# EAGLE board can_main_mb_v18_r4 (EAGLE 8.0.1), part 1 of 2
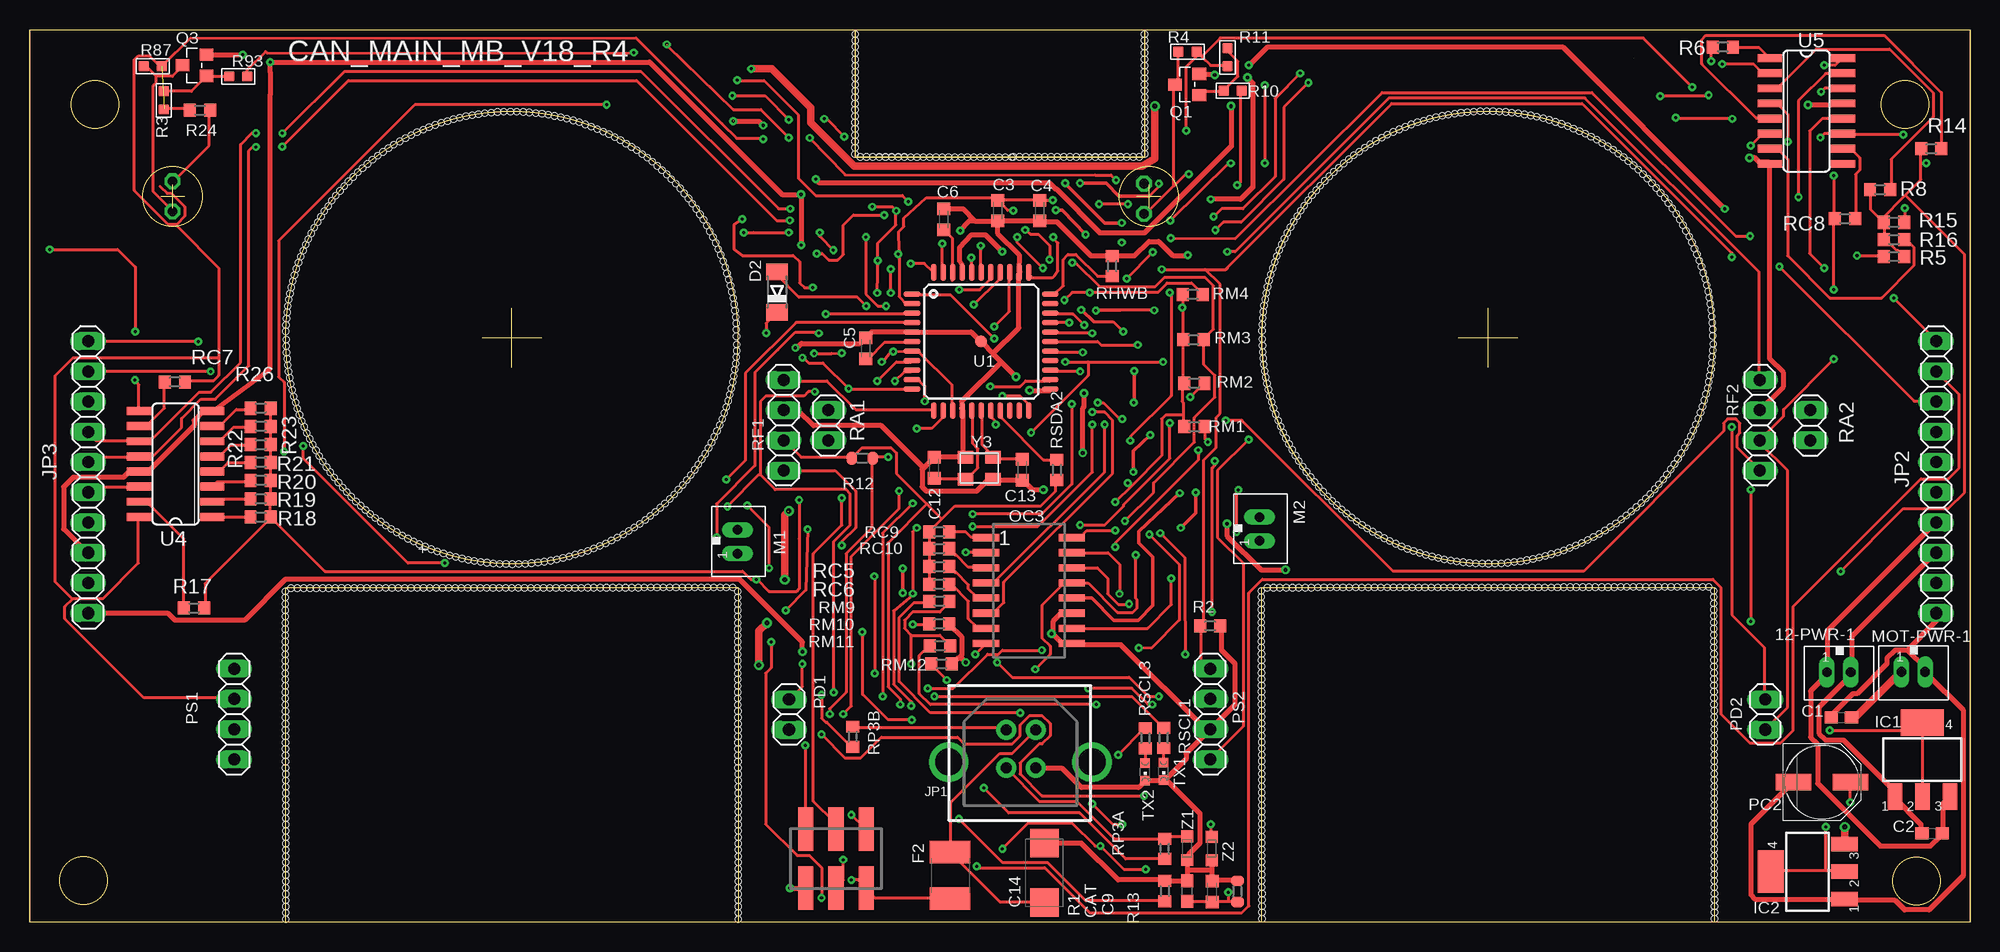
[diagram p0: board, top side]
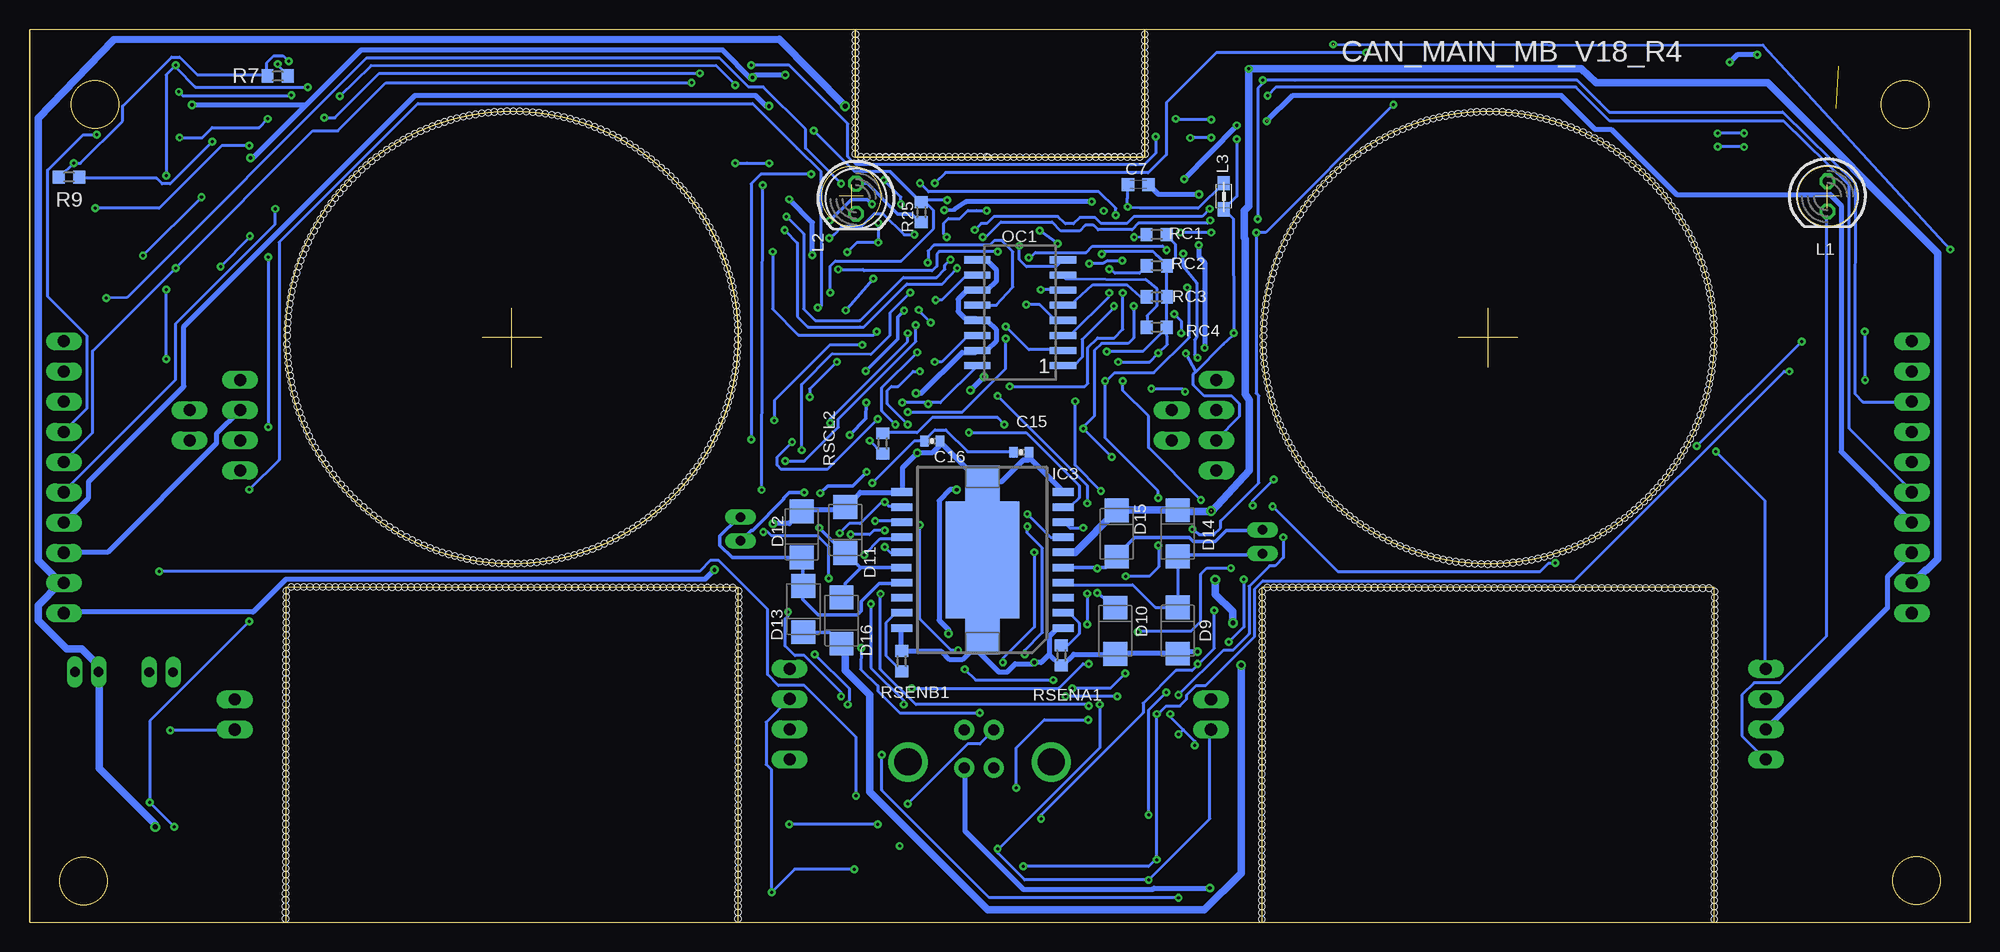
[diagram p1: board, bottom side, seen from below]

Size 163 x 75 mm. Coordinates in mm from the lower left corner, seen from the top.
Outline: 40.5,46.62 40.5,51.62
Outline: 38,49.12 43,49.12
Outline: 120,49.12 125,49.12
Outline: 122.5,46.62 122.5,51.62
Outline: 2.5,75 69.33,75
Outline: 69.33,75 93.64,75
Outline: 93.64,75 162.5,75
Outline: 162.5,0 59.5,0
Outline: 59.5,0 21.5,0
Outline: 21.5,0 2.5,0
Outline: 21.5,0 21.5,28.13 59.5,28.13 59.5,0
Outline: 103.5,0 103.5,28.13 141.5,28.13 141.5,0
Outline: 69.33,75 69.33,64.31 93.64,64.31 93.64,75
Outline: 93.67,75 163,75
Outline: 163,0 163,75
Outline: 163,0 141.5,0
Outline: 141.5,28.13 141.5,0
Outline: 103.5,28.13 141.5,28.13
Outline: 103.5,0 103.5,28.13
Outline: 103.5,0 59.5,0
Outline: 59.5,28.13 59.5,0
Outline: 21.5,28.13 59.5,28.13
Outline: 21.5,0 21.5,28.13
Outline: 21.5,0 0,0
Outline: 0,75 0,0
Outline: 0,75 69.36,75
Outline: 69.36,64.31 69.36,75
Outline: 93.67,64.31 69.36,64.31
Outline: 93.67,75 93.67,64.31
Outline: 93.67,75 163,75
Outline: 163,0 163,75
Outline: 163,0 141.5,0
Outline: 141.5,28.13 141.5,0
Outline: 103.5,28.13 141.5,28.13
Outline: 103.5,0 103.5,28.13
Outline: 103.5,0 59.5,0
Outline: 59.5,28.13 59.5,0
Outline: 21.5,28.13 59.5,28.13
Outline: 21.5,0 21.5,28.13
Outline: 21.5,0 0,0
Outline: 0,75 0,0
Outline: 0,75 69.36,75
Outline: 69.36,64.31 69.36,75
Outline: 93.67,64.31 69.36,64.31
Outline: 93.67,75 93.67,64.31
Outline: 21.5,0 0,0
Outline: 0,75 0,0
Outline: 0,75 69.36,75
Outline: 69.36,64.31 69.36,75
Outline: 93.67,64.31 69.36,64.31
Outline: 93.67,75 93.67,64.31
Outline: 93.67,75 163,75
Outline: 163,75 163,0
Outline: 163,0 141.5,0
Outline: 141.5,28.13 141.5,0
Outline: 103.5,28.13 141.5,28.13
Outline: 103.5,0 103.5,28.13
Outline: 103.5,0 59.5,0
Outline: 59.5,28.13 59.5,0
Outline: 21.5,28.13 59.5,28.13
Outline: 21.5,0 21.5,28.13
Outline: 93.67,75 163,75 163,0 141.5,0 141.5,28.13 103.5,28.13 103.5,0 59.5,0 59.5,28.13 21.5,28.13 21.5,0 0,0 0,75 69.36,75 69.36,64.31 93.67,64.31 93.67,75
Outline: 93.67,75 163,75 163,0 141.5,0 141.5,28.13 103.5,28.13 103.5,0 59.5,0 59.5,28.13 21.5,28.13 21.5,0 0,0 0,75 69.36,75 69.36,64.31 93.67,64.31 93.67,75
Outline: circle at 122.5,49.12 radius 19
Outline: circle at 40.5,49.12 radius 19
Outline: circle at 122.5,49.13 radius 19
Outline: circle at 40.5,49.13 radius 19
Outline: circle at 122.5,49.13 radius 19
Outline: circle at 40.5,49.13 radius 19
Outline: circle at 40.5,49.13 radius 19
Outline: circle at 122.5,49.13 radius 19
Outline: circle at 122.5,49.13 radius 19
Outline: circle at 40.5,49.13 radius 19
Outline: circle at 4.5,3.5 radius 2
Outline: circle at 158.5,3.47 radius 2
Outline: circle at 157.53,68.72 radius 2
Outline: circle at 122.5,49.13 radius 19
Outline: circle at 40.5,49.13 radius 19
Outline: circle at 5.47,68.72 radius 2
Outline: circle at 122.5,49.13 radius 19
Outline: circle at 40.5,49.13 radius 19
Outline: circle at 4.5,3.5 radius 2
Outline: circle at 158.5,3.47 radius 2
Copper layers (1*2*3*16): Top 0.035mm / dielectric 0.2mm / Route2 0.035mm / dielectric 0.15mm / Route3 0.035mm / dielectric 0.2mm / Bottom 0.035mm
Design rules "meditab *": minimum track width 7mil, minimum drill 7mil, track to track 7mil, track to pad 7mil, pad to pad 7mil, via to via 7mil, smd to smd 7mil, copper to edge 7mil, drill to drill 7mil, minimum pad ring 10mil, minimum via ring 8mil, stop-mask expansion 4mil, vias tented up to drill 0mil, thermal gap 10mil
Net classes: 0 default: width 0.254 mm, drill 0.254 mm, clearance 0.203 mm; 1 power: width 0.635 mm, drill 0.584 mm, clearance 0.305 mm; 2 gnd: width 0.406 mm, drill 0.305 mm, clearance 0.254 mm; 3 power usb: width 0.508 mm, drill 0.406 mm, clearance 0.203 mm; 4 motor: width 0.305 mm, drill 0.254 mm, clearance 0.203 mm; 5 0.6096: width 0.61 mm, drill 0.406 mm, clearance 0.305 mm
Holes 0.5 mm at 21.51,0.25 21.51,0.78 21.51,1.31 21.51,1.84 21.51,2.37 21.5,2.9 21.5,3.43 21.5,3.96 21.5,4.49 21.5,5.02 21.5,5.55 21.5,6.08 21.5,6.61 21.5,7.14 21.5,7.67 21.49,8.2 21.49,8.73 21.49,9.26 21.49,9.79 21.49,10.32 21.49,10.85 21.49,11.38 21.49,11.91 21.49,12.44 21.48,12.97 21.48,13.5 21.48,14.03 21.48,14.56 21.48,15.09 21.48,15.62 21.48,16.15 21.48,16.68 21.48,17.21 21.48,17.74 21.47,18.27 21.47,18.8 21.47,19.33 21.47,19.86 21.47,20.39 21.47,20.92 21.47,21.45 21.47,21.98 21.47,22.51 21.46,23.04 21.46,23.57 21.46,24.1 21.46,24.63 21.46,25.16 21.46,25.69 21.46,26.22 21.46,26.75 21.46,27.28 21.46,27.81 59.52,0.25 59.52,0.78 59.52,1.31 59.52,1.84 59.52,2.37 59.51,2.9 59.51,3.43 59.51,3.96 59.51,4.49 59.51,5.02 59.51,5.55 59.51,6.08 59.51,6.61 59.51,7.14 59.51,7.67 59.5,8.2 59.5,8.73 59.5,9.26 59.5,9.79 59.5,10.32 59.5,10.85 59.5,11.38 59.5,11.91 59.5,12.44 59.49,12.97 59.49,13.5 59.49,14.03 59.49,14.56 59.49,15.09 59.49,15.62 59.49,16.15 59.49,16.68 59.49,17.21 59.49,17.74 59.48,18.27 59.48,18.8 59.48,19.33 59.48,19.86 59.48,20.39 59.48,20.92 59.48,21.45 59.48,21.98 59.48,22.51 59.47,23.04 59.47,23.57 59.47,24.1 59.47,24.63 59.47,25.16 59.47,25.69 59.47,26.22 59.47,26.75 59.47,27.28 59.47,27.81 59.05,28.13 58.52,28.13 57.99,28.13 57.46,28.13 56.93,28.13 56.4,28.12 55.87,28.12 55.34,28.12 54.81,28.12 54.28,28.12 53.75,28.12 53.22,28.12 52.69,28.12 52.16,28.12 51.63,28.12 51.1,28.11 50.57,28.11 50.04,28.11 49.51,28.11 48.98,28.11 48.45,28.11 47.92,28.11 47.39,28.11 46.86,28.11 46.33,28.1 45.8,28.1 45.27,28.1 44.74,28.1 44.21,28.1 43.68,28.1 43.15,28.1 42.62,28.1 42.09,28.1 41.56,28.1 41.03,28.09 40.5,28.09 39.97,28.09 39.44,28.09 38.91,28.09 38.38,28.09 37.85,28.09 37.32,28.09 36.79,28.09 36.26,28.08 35.73,28.08 35.2,28.08 34.67,28.08 34.14,28.08 33.61,28.08 33.08,28.08 32.55,28.08 32.02,28.08 31.49,28.08 23.01,28.07 23.54,28.07 24.07,28.07 24.6,28.07 25.13,28.07 25.66,28.07 26.19,28.08 26.72,28.08 27.25,28.08 27.78,28.08 28.31,28.08 28.84,28.08 29.37,28.08 29.9,28.08 30.43,28.08 30.96,28.08 21.95,28.07 22.48,28.07 21.51,49.66 21.53,50.19 21.57,50.72 21.62,51.25 21.68,51.78 21.77,52.31 21.86,52.83 21.97,53.35 22.1,53.87 22.24,54.39 22.4,54.91 22.57,55.42 22.75,55.93 22.96,56.43 23.18,56.93 23.4,57.41 23.64,57.89 23.9,58.37 24.18,58.84 24.46,59.3 24.75,59.75 25.06,60.19 25.38,60.63 25.71,61.05 26.06,61.46 26.41,61.86 26.78,62.26 27.16,62.64 27.55,63.02 27.95,63.38 28.37,63.73 28.79,64.08 29.22,64.41 29.67,64.73 30.13,65.05 30.59,65.34 31.07,65.62 31.56,65.88 32.04,66.14 32.53,66.38 33.04,66.59 33.54,66.8 34.05,67 34.57,67.18 35.09,67.32 35.6,67.48 36.12,67.61 36.64,67.73 37.16,67.83 37.69,67.92 38.22,67.99 38.76,68.04 39.29,68.09 39.83,68.11 40.38,68.12 40.53,30.09 40,30.1 39.47,30.12 38.94,30.16 38.41,30.21 37.88,30.27 37.35,30.36 36.83,30.45 36.31,30.56 35.79,30.69 35.27,30.83 34.75,30.99 34.24,31.16 33.73,31.34 33.23,31.55 32.73,31.77 32.25,31.99 31.77,32.23 31.29,32.49 30.82,32.77 30.36,33.05 29.91,33.34 29.47,33.65 29.03,33.97 28.61,34.3 28.2,34.65 27.8,35 27.4,35.37 27.02,35.75 26.64,36.14 26.28,36.54 25.93,36.96 25.58,37.38 25.25,37.81 24.93,38.26 24.61,38.72 24.32,39.18 24.04,39.66 23.78,40.15 23.52,40.63 23.28,41.12 23.07,41.63 22.86,42.13 22.66,42.64 22.48,43.16 22.34,43.68 22.18,44.19 22.05,44.71 21.93,45.23 21.83,45.75 21.74,46.28 21.67,46.81 21.62,47.35 21.57,47.88 21.55,48.42 21.54,48.97 59.4,48.55 59.38,48.02 59.34,47.49 59.29,46.96 59.23,46.43 59.14,45.9 59.05,45.38 58.94,44.86 58.81,44.34 58.67,43.82 58.51,43.3 58.34,42.79 58.16,42.28 57.95,41.78 57.73,41.28 57.51,40.8 57.27,40.32 57.01,39.84 56.73,39.37 56.45,38.91 56.16,38.46 55.85,38.02 55.53,37.58 55.2,37.16 54.85,36.75 54.5,36.35 54.13,35.95 53.75,35.57 53.36,35.19 52.96,34.83 52.54,34.48 52.12,34.13 51.69,33.8 51.24,33.48 50.78,33.16 50.32,32.87 49.84,32.59 49.35,32.33 48.87,32.07 48.38,31.83 47.87,31.62 47.37,31.41 46.86,31.21 46.34,31.03 45.82,30.89 45.31,30.73 44.79,30.6 44.27,30.48 43.75,30.38 43.22,30.29 42.69,30.22 42.15,30.17 41.62,30.12 41.08,30.1 40.53,30.09 40.38,68.12 40.91,68.11 41.44,68.09 41.97,68.05 42.5,68 43.03,67.94 43.56,67.85 44.08,67.76 44.6,67.65 45.12,67.52 45.64,67.38 46.16,67.22 46.67,67.05 47.18,66.87 47.68,66.66 48.18,66.44 48.66,66.22 49.14,65.98 49.62,65.72 50.09,65.44 50.55,65.16 51,64.87 51.44,64.56 51.88,64.24 52.3,63.91 52.71,63.56 53.11,63.21 53.51,62.84 53.89,62.46 54.27,62.07 54.63,61.67 54.98,61.25 55.33,60.83 55.66,60.4 55.98,59.95 56.3,59.49 56.59,59.03 56.87,58.55 57.13,58.06 57.39,57.58 57.63,57.09 57.84,56.58 58.05,56.08 58.25,55.57 58.43,55.05 58.57,54.53 58.73,54.02 58.86,53.5 58.98,52.98 59.08,52.46 59.17,51.93 59.24,51.4 59.29,50.86 59.34,50.33 59.36,49.79 59.37,49.24 103.51,0.29 103.51,0.82 103.51,1.35 103.51,1.88 103.51,2.41 103.5,2.94 103.5,3.47 103.5,4 103.5,4.53 103.5,5.06 103.5,5.59 103.5,6.12 103.5,6.65 103.5,7.18 103.5,7.71 103.49,8.24 103.49,8.77 103.49,9.3 103.49,9.83 103.49,10.36 103.49,10.89 103.49,11.42 103.49,11.95 103.49,12.48 103.48,13.01 103.48,13.54 103.48,14.07 103.48,14.6 103.48,15.13 103.48,15.66 103.48,16.19 103.48,16.72 103.48,17.25 103.48,17.78 103.47,18.31 103.47,18.84 103.47,19.37 103.47,19.9 103.47,20.43 103.47,20.96 103.47,21.49 103.47,22.02 103.47,22.55 103.46,23.08 103.46,23.61 103.46,24.14 103.46,24.67 103.46,25.2 103.46,25.73 103.46,26.26 103.46,26.79 103.46,27.32 103.46,27.85 141.52,0.29 141.52,0.82 141.52,1.35 141.52,1.88 141.52,2.41 141.51,2.94 141.51,3.47 141.51,4 141.51,4.53 141.51,5.06 141.51,5.59 141.51,6.12 141.51,6.65 141.51,7.18 141.51,7.71 141.5,8.24 141.5,8.77 141.5,9.3 141.5,9.83 141.5,10.36 141.5,10.89 141.5,11.42 141.5,11.95 141.5,12.48 141.49,13.01 141.49,13.54 141.49,14.07 141.49,14.6 141.49,15.13 141.49,15.66 141.49,16.19 141.49,16.72 141.49,17.25 141.49,17.78 141.48,18.31 141.48,18.84 141.48,19.37 141.48,19.9 141.48,20.43 141.48,20.96 141.48,21.49 141.48,22.02 141.48,22.55 141.47,23.08 141.47,23.61 141.47,24.14 141.47,24.67 141.47,25.2 141.47,25.73 141.47,26.26 141.47,26.79 141.47,27.32 141.47,27.85 141.05,28.17 140.52,28.17 139.99,28.17 139.46,28.17 138.93,28.17 138.4,28.16 137.87,28.16 137.34,28.16 136.81,28.16 136.28,28.16 135.75,28.16 135.22,28.16 134.69,28.16 134.16,28.16 133.63,28.16 133.1,28.15 132.57,28.15 132.04,28.15 131.51,28.15 130.98,28.15 130.45,28.15 129.92,28.15 129.39,28.15 128.86,28.15 128.33,28.14 127.8,28.14 127.27,28.14 126.74,28.14 126.21,28.14 125.68,28.14 125.15,28.14 124.62,28.14 124.09,28.14 123.56,28.14 123.03,28.13 122.5,28.13 121.97,28.13 121.44,28.13 120.91,28.13 120.38,28.13 119.85,28.13 119.32,28.13 118.79,28.13 118.26,28.12 117.73,28.12 117.2,28.12 116.67,28.12 116.14,28.12 115.61,28.12 115.08,28.12 114.55,28.12 114.02,28.12 113.49,28.12 105.01,28.11 105.54,28.11 106.07,28.11 106.6,28.11 107.13,28.11 107.66,28.11 108.19,28.12 108.72,28.12 109.25,28.12 109.78,28.12 110.31,28.12 110.84,28.12 111.37,28.12 111.9,28.12 112.43,28.12 112.96,28.12 103.95,28.11 104.48,28.11 103.51,49.7 103.53,50.23 103.57,50.76 103.62,51.29 103.68,51.82 103.77,52.35 103.86,52.87 103.97,53.39 104.1,53.91 104.24,54.43 104.4,54.95 104.57,55.46 104.75,55.97 104.96,56.47 105.18,56.97 105.4,57.45 105.64,57.93 105.9,58.41 106.18,58.88 106.46,59.34 106.75,59.79 107.06,60.23 107.38,60.67 107.71,61.09 108.06,61.5 108.41,61.9 108.78,62.3 109.16,62.68 109.55,63.06 109.95,63.42 110.37,63.77 110.79,64.12 111.22,64.45 111.67,64.77 112.13,65.09 112.59,65.38 113.07,65.66 113.56,65.92 114.04,66.18 114.53,66.42 115.04,66.63 115.54,66.84 116.05,67.04 116.57,67.22 117.09,67.36 117.6,67.52 118.12,67.65 118.64,67.77 119.16,67.87 119.69,67.96 120.22,68.03 120.76,68.08 121.29,68.13 121.83,68.15 122.38,68.16 122.53,30.13 122,30.14 121.47,30.16 120.94,30.2 120.41,30.25 119.88,30.31 119.35,30.4 118.83,30.49 118.31,30.6 117.79,30.73 117.27,30.87 116.75,31.03 116.24,31.2 115.73,31.38 115.23,31.59 114.73,31.81 114.25,32.03 113.77,32.27 113.29,32.53 112.82,32.81 112.36,33.09 111.91,33.38 111.47,33.69 111.03,34.01 110.61,34.34 110.2,34.69 109.8,35.04 109.4,35.41 109.02,35.79 108.64,36.18 108.28,36.58 107.93,37 107.58,37.42 107.25,37.85 106.93,38.3 106.61,38.76 106.32,39.22 106.04,39.7 105.78,40.19 105.52,40.67 105.28,41.16 105.07,41.67 104.86,42.17 104.66,42.68 104.48,43.2 104.34,43.72 104.18,44.23 104.05,44.75 103.93,45.27 103.83,45.79 103.74,46.32 103.67,46.85 103.62,47.39 103.57,47.92 103.55,48.46 103.54,49.01 141.4,48.59 141.38,48.06 141.34,47.53 141.29,47 141.23,46.47 141.14,45.94 141.05,45.42 140.94,44.9 140.81,44.38 140.67,43.86 140.51,43.34 140.34,42.83 140.16,42.32 139.95,41.82 139.73,41.32 139.51,40.84 139.27,40.36 139.01,39.88 138.73,39.41 138.45,38.95 138.16,38.5 137.85,38.06 137.53,37.62 137.2,37.2 136.85,36.79 136.5,36.39 136.13,35.99 135.75,35.61 135.36,35.23 134.96,34.87 134.54,34.52 134.12,34.17 133.69,33.84 133.24,33.52 132.78,33.2 132.32,32.91 131.84,32.63 131.35,32.37 130.87,32.11 130.38,31.87 129.87,31.66 129.37,31.45 128.86,31.25 128.34,31.07 127.82,30.93 127.31,30.77 126.79,30.64 126.27,30.52 125.75,30.42 125.22,30.33 124.69,30.26 124.15,30.21 123.62,30.16 123.08,30.14 122.53,30.13 122.38,68.16 122.91,68.15 123.44,68.13 123.97,68.09 124.5,68.04 125.03,67.98 125.56,67.89 126.08,67.8 126.6,67.69 127.12,67.56 127.64,67.42 128.16,67.26 128.67,67.09 129.18,66.91 129.68,66.7 130.18,66.48 130.66,66.26 131.14,66.02 131.62,65.76 132.09,65.48 132.55,65.2 133,64.91 133.44,64.6 133.88,64.28 134.3,63.95 134.71,63.6 135.11,63.25 135.51,62.88 135.89,62.5 136.27,62.11 136.63,61.71 136.98,61.29 137.33,60.87 137.66,60.44 137.98,59.99 138.3,59.53 138.59,59.07 138.87,58.59 139.13,58.1 139.39,57.62 139.63,57.13 139.84,56.62 140.05,56.12 140.25,55.61 140.43,55.09 140.57,54.57 140.73,54.06 140.86,53.54 140.98,53.02 141.08,52.5 141.17,51.97 141.24,51.44 141.29,50.9 141.34,50.37 141.36,49.83 141.37,49.28 71.35,64.29 71.88,64.29 72.41,64.29 72.94,64.29 73.47,64.29 74,64.29 74.53,64.3 75.06,64.3 75.59,64.3 76.12,64.3 76.65,64.3 77.18,64.3 77.71,64.3 78.24,64.3 78.77,64.3 79.3,64.3 82.48,64.3 81.95,64.3 81.42,64.3 80.89,64.3 80.36,64.3 79.83,64.3 69.33,73.04 69.33,72.51 69.33,71.98 69.33,71.45 69.33,70.92 69.33,70.39 69.33,69.86 69.32,69.33 69.32,68.8 69.32,68.27 69.32,67.74 69.32,67.21 69.32,66.68 69.32,66.15 69.32,65.62 69.32,65.09 69.32,64.56 70.82,64.31 71.35,64.31 71.88,64.31 72.41,64.31 72.94,64.31 73.47,64.31 74,64.3 74.53,64.3 75.06,64.3 75.59,64.3 76.12,64.3 76.65,64.3 77.18,64.3 69.76,64.31 70.29,64.31 69.33,74.63 69.33,74.1 69.33,73.57 69.33,73.04 91.62,64.3 91.09,64.3 90.56,64.3 90.03,64.3 89.5,64.3 88.97,64.3 88.44,64.31 87.91,64.31 87.38,64.31 86.85,64.31 86.32,64.31 85.79,64.31 85.26,64.31 84.73,64.31 84.2,64.31 83.67,64.31 82.61,64.31 83.14,64.31 93.64,73.05 93.64,72.52 93.64,71.99 93.64,71.46 93.64,70.93 93.64,70.4 93.64,69.87 93.65,69.34 93.65,68.81 93.65,68.28 93.65,67.75 93.65,67.22 93.65,66.69 93.65,66.16 93.65,65.63 93.65,65.1 93.65,64.57 92.15,64.32 91.62,64.32 91.09,64.32 90.56,64.32 90.03,64.32 89.5,64.32 88.97,64.31 88.44,64.31 87.91,64.31 87.38,64.31 86.85,64.31 86.32,64.31 85.79,64.31 93.21,64.32 92.68,64.32 93.64,74.64 93.64,74.11 93.64,73.58 93.64,73.05
Milling: area 9.5,58.5 to 14.5,63.5; area 91.5,58.5 to 96.5,63.5; 13 lines

## Footprints (pad centres in the part's own frame; a part is rotated, then mirrored left to right if it is on the bottom)
JST_B2B-PH_HEADER = drill 0.8 long: P1 1.075,0.048; P2 -0.925,0.048
C0603 = smd 1.1 x 1: 1 -0.85,0; 2 0.85,0
C0603K = smd 1.05 x 1.08: 1 -0.875,0; 2 0.875,0
SMC_C = smd 2.4 x 2.4: + -2.5,0; - 2.5,0
0402-CAP = smd 0.7 x 0.9: 1 -0.65,0; 2 0.65,0
0603 = smd 1.1 x 1: 1 -0.85,0; 2 0.85,0
MINIMELF = smd 1.4 x 1.8: A 1.7,0; C -1.7,0
SMA = smd 2 x 2: P$1 -1.94,0; P$2 1.94,0
L1812 = smd 1.9 x 3.4: 1 -1.95,0; 2 1.95,0
SOT223 = smd 1.219 x 2.235: 1 -2.311,-3.099; 2 0,-3.099; 3 2.311,-3.099 | smd 3.6 x 2.2: 4 0,3.099
POWER-SO20 = smd 0.635 x 1.778: P$1 -5.715,-6.782; P$2 -4.445,-6.782; P$3 -3.175,-6.782; P$4 -1.905,-6.782; P$5 -0.635,-6.782; P$6 0.635,-6.782; P$7 1.905,-6.782; P$8 3.175,-6.782; P$9 4.445,-6.782; P$10 5.715,-6.782; P$11 5.715,6.782; P$12 4.445,6.782; P$13 3.175,6.782; P$14 1.905,6.782; P$15 0.635,6.782; P$17 -1.905,6.782; P$18 -3.175,6.782; P$19 -4.445,6.782; P$20 -5.715,6.782 | smd 0.635 x 1.651: P$16 -0.635,6.833 | smd 9.804 x 6.198: P$21 0,0 | smd 3.048 x 2.921: P$22 -6.426,0; P$23 6.426,0
TSM-103-XX-XXX-DV-A = smd 1.27 x 3.683: 1 -2.54,-2.477; 2 -2.54,2.477; 3 0,-2.477; 4 0,2.477; 5 2.54,-2.477; 6 2.54,2.477
USB-B-PTH-VERTICAL = drill 0.914 pad 1.676: D+ 4.826,4.394; D- 4.826,7.595; GND 7.315,4.394; VBUS 7.315,7.595 | drill 2.286: P$1 0,4.902; P$2 12.04,4.902
1X10 = drill 1.016 long: 1 -11.43,0; 2 -8.89,0; 3 -6.35,0; 4 -3.81,0; 5 -1.27,0; 6 1.27,0; 7 3.81,0; 8 6.35,0; 9 8.89,0; 10 11.43,0
LED5MM = drill 0.813 octagon: A -1.27,0; K 1.27,0
0805 = smd 1.2 x 1: 1 -1.1,0; 2 1.1,0
SOP16 = smd 0.6 x 2.2: 1 -4.455,-3.6; 2 -3.185,-3.6; 3 -1.915,-3.6; 4 -0.645,-3.6; 5 0.625,-3.6; 6 1.895,-3.6; 7 3.165,-3.6; 8 4.435,-3.6; 9 4.435,3.6; 10 3.165,3.6; 11 1.895,3.6; 12 0.625,3.6; 13 -0.645,3.6; 14 -1.915,3.6; 15 -3.185,3.6; 16 -4.455,3.6
PANASONIC_D = smd 3 x 1.4: + 2.4,0; - -2.4,0
1X02 = drill 1.016 long: 1 -1.27,0; 2 1.27,0
1X04 = drill 1.016 long: 1 -3.81,0; 2 -1.27,0; 3 1.27,0; 4 3.81,0
SOT23 = smd 1.016 x 1.143: 1 -0.889,-1.016; 2 0.889,-1.016; 3 0,1.016
R0603 = smd 1 x 1.1: 1 -0.85,0; 2 0.85,0
R0603' = smd 0.889 x 0.889: 1 -0.762,0; 2 0.762,0
R0603-ROUND = smd 0.898 x 1.1: 1 -0.889,0; 2 0.889,0
CHIPLED_0603 = smd 0.8 x 0.8: A 0,-0.75; C 0,0.75
TQFP44-PAD = smd 1.4 x 0.45: 1 -5.8,4; 2 -5.8,3.2; 3 -5.8,2.4; 4 -5.8,1.6; 5 -5.8,0.8; 6 -5.8,0; 7 -5.8,-0.8; 8 -5.8,-1.6; 9 -5.8,-2.4; 10 -5.8,-3.2; 11 -5.8,-4; 23 5.8,-4; 24 5.8,-3.2; 25 5.8,-2.4; 26 5.8,-1.6; 27 5.8,-0.8; 28 5.8,0; 29 5.8,0.8; 30 5.8,1.6; 31 5.8,2.4; 32 5.8,3.2; 33 5.8,4 | smd 0.45 x 1.4: 12 -4,-5.8; 13 -3.2,-5.8; 14 -2.4,-5.8; 15 -1.6,-5.8; 16 -0.8,-5.8; 17 0,-5.8; 18 0.8,-5.8; 19 1.6,-5.8; 20 2.4,-5.8; 21 3.2,-5.8; 22 4,-5.8; 34 4,5.8; 35 3.2,5.8; 36 2.4,5.8; 37 1.6,5.8; 38 0.8,5.8; 39 0,5.8; 40 -0.8,5.8; 41 -1.6,5.8; 42 -2.4,5.8; 43 -3.2,5.8; 44 -4,5.8 | smd 1 x 1: P$1 0,0
SO16 = smd 0.66 x 2.032: 1 -4.445,-3.073; 2 -3.175,-3.073; 3 -1.905,-3.073; 4 -0.635,-3.073; 5 0.635,-3.073; 6 1.905,-3.073; 7 3.175,-3.073; 8 4.445,-3.073; 9 4.445,3.073; 10 3.175,3.073; 11 1.905,3.073; 12 0.635,3.073; 13 -0.635,3.073; 14 -1.905,3.073; 15 -3.175,3.073; 16 -4.445,3.073
CRYSTAL-3.2-2.5 = smd 1.3 x 1.05: 1 -1.15,-0.925; 2 1.15,-0.925; 3 1.15,0.925; 4 -1.15,0.925
CT/CN0603 = smd 1 x 1: 1 -1,0; 2 1,0

## Placement (x,y rotation side)
12-PWR-1  [JST_B2B-PH_HEADER]  152.04,21.05 180 top
C1  100n  [C0603]  152.18,17.21 0 top
C2  100n  [C0603]  159.8,7.46 0 top
C3  100n  [C0603K]  81.31,59.8 270 top
C4  100n  [C0603K]  84.84,59.79 270 top
C5  1uF  [C0603K]  70.22,48.22 90 top
C6  100n  [C0603K]  76.78,59.07 90 top
C7  1uF  [C0603K]  69.88,61.99 0 bottom
C9  100n  [C0603K]  99.32,2.58 90 top
C12  22pF  [C0603K]  75.97,38.2 270 top
C13  22pF  [C0603K]  83.37,38.01 90 top
C14  22u  [SMC_C]  85.23,4.15 90 top
C15  .1uF  [0402-CAP]  79.72,39.49 180 bottom
C16  .1uF  [0402-CAP]  87.2,40.44 180 bottom
CAT  100nF  [0603]  97.23,2.62 90 top
D2  CD1206-S01575  [MINIMELF]  62.77,52.96 90 top
D9  [SMA]  66.57,24.51 270 bottom
D10  [SMA]  71.82,24.5 270 bottom
D11  [SMA]  94.5,32.96 90 bottom
D12  [SMA]  98.15,32.58 90 bottom
D13  [SMA]  98.02,26.31 90 bottom
D14  SS14  [SMA]  66.57,32.68 270 bottom
D15  [SMA]  71.7,32.65 270 bottom
D16  [SMA]  94.82,25.34 90 bottom
F2  MF-MSMF050-2 500mA  [L1812]  77.31,3.93 270 top
IC1  NCP1117ST50T3G  [SOT223]  158.98,13.67 0 top
IC2  NCP1117ST50T3G  [SOT223]  149.33,4.25 90 top
IC3  L298P  [POWER-SO20]  82.97,30.44 90 bottom
ICSP  2X3.TSM.DV  [TSM-103-XX-XXX-DV-A]  67.72,5.35 180 top
JP1  USB  [USB-B-PTH-VERTICAL]  77.19,8.56 0 top
JP2  [1X10]  160.14,37.4 90 top
JP3  [1X10]  4.9,37.4 90 top
L1  [LED5MM]  12,61 270 bottom
L2  [LED5MM]  93.6,60.8 270 bottom
L3  MH2029-300Y  [0805]  62.7,61.01 90 bottom
M1  [JST_B2B-PH_HEADER]  59.41,32.05 270 top
M2  [JST_B2B-PH_HEADER]  103.25,33.12 270 top
MOT-PWR-1  [JST_B2B-PH_HEADER]  158.29,21.08 180 top
OC1  ACPL-247  [SOP16]  79.81,51.22 90 bottom
OC3  ACPL-247  [SOP16]  83.93,27.86 270 top
PC2  47u  [PANASONIC_D]  150.54,11.77 0 top
PD1  [1X02]  63.78,17.45 270 top
PD2  [1X02]  145.78,17.45 270 top
PS1  [1X04]  17.17,17.49 90 top
PS2  [1X04]  99.17,17.49 90 top
Q1  BC817  [SOT23]  97.22,70.4 90 top
Q3  BC817  [SOT23]  13.83,72.01 90 top
R1  10K  [R0603]  95.35,2.62 270 top
R2  10K  [R0603]  99.16,24.91 180 top
R3  1k  [R0603']  11.25,69.07 90 top
R4  15R  [R0603']  97.25,73.17 0 top
R5  [R0603]  156.59,55.94 180 top
R6  [R0603]  142.22,73.54 0 top
R7  [R0603]  142.18,71.12 0 bottom
R8  [R0603]  155.43,61.56 0 top
R9  [R0603]  159.7,62.62 0 bottom
R10  3.9k  [R0603']  101.06,69.87 180 top
R11  1k  [R0603']  100.61,72.68 90 top
R12  10K  [R0603-ROUND]  69.93,38.99 0 top
R13  10K  [R0603-ROUND]  101.45,2.58 270 top
R14  [R0603]  159.73,65 0 top
R15  [R0603]  156.59,58.82 0 top
R16  [R0603]  156.59,57.36 0 top
R17  [R0603]  13.8,26.4 180 top
R18  [R0603]  19.39,34.04 180 top
R19  [R0603]  19.39,35.57 180 top
R20  [R0603]  19.39,37.13 180 top
R21  [R0603]  19.39,38.64 180 top
R22  [R0603]  19.39,40.14 180 top
R23  [R0603]  19.39,41.67 180 top
R24  220  [R0603]  14.3,68.24 180 top
R25  220  [R0603]  88.11,59.67 90 bottom
R26  [R0603]  19.39,43.19 180 top
R87  15R  [R0603']  10.33,71.95 0 top
R93  3.9k  [R0603']  17.51,71.08 180 top
RA1  [1X02]  67.08,41.76 90 top
RA2  [1X02]  149.57,41.76 90 top
RC1  470  [R0603]  68.34,57.8 0 bottom
RC2  470  [R0603]  68.32,55.16 0 bottom
RC3  470  [R0603]  68.32,52.56 0 bottom
RC4  470  [R0603]  68.33,50 0 bottom
RC5  470  [R0603]  76.39,29.89 180 top
RC6  470  [R0603]  76.39,28.39 180 top
RC7  470  [R0603]  12.19,45.41 0 top
RC8  470  [R0603]  152.48,59.12 180 top
RC9  470  [R0603]  76.39,32.81 180 top
RC10  470  [R0603]  76.39,31.39 180 top
RF1  [1X04]  63.33,41.76 270 top
RF2  [1X04]  145.33,41.76 270 top
RHWB  10k  [R0603]  90.92,55.14 90 top
RM1  1k  [R0603]  97.83,41.65 0 top
RM2  1k  [R0603]  97.83,45.29 0 top
RM3  1k  [R0603]  97.76,48.95 0 top
RM4  1k  [R0603]  97.7,52.76 0 top
RM9  1k  [R0603]  76.41,26.96 180 top
RM10  100k  [R0603]  76.4,25.08 0 top
RM11  1k  [R0603]  76.46,23.22 180 top
RM12  100k  [R0603]  76.58,21.71 0 top
RP3A  22R  [R0603]  95.33,6.17 90 top
RP3B  22R  [R0603]  69.13,15.59 90 top
RSCL1  1k  [R0603]  95.25,15.48 270 top
RSCL2  4.7k  [R0603]  91.36,40.24 90 bottom
RSCL3  1k  [R0603]  93.71,15.46 270 top
RSDA2  4.7k  [R0603]  86.28,38.01 90 top
RSENA1  0.15  [R0603]  76.35,22.42 270 bottom
RSENB1  0.15  [R0603]  89.77,21.94 90 bottom
TX1  yellow  [CHIPLED_0603]  95.25,12.68 180 top
TX2  yellow  [CHIPLED_0603]  93.7,12.63 180 top
U1  ATMEGA32U4-XUAU  [TQFP44-PAD]  79.92,48.8 0 top
U4  74LS595D  [SO16]  12.25,38.51 90 top
U5  74LS595D  [SO16]  149.25,68.17 270 top
Y3  16MHz KX-7  [CRYSTAL-3.2-2.5]  79.76,38.16 0 top
Z1  CG0603MLC-05E  [CT/CN0603]  97.22,6.22 270 top
Z2  CG0603MLC-05E  [CT/CN0603]  99.29,6.19 270 top

## Library data of the parts
12-PWR-1 M1 M2 MOT-PWR-1 = SRG
C1 C2 C14 F2 PC2 = rcl
C3-C7 C9 C12 C13 D9-D16 IC3 R12 R13 U1 Y3 = SmartPrj
C15 C16 = SparkFun-Passives
CAT U4 U5 = SparkFun
D2 = diode
IC1 IC2 = linear
ICSP = headers_samtec
JP1 = SparkFun-Connectors
JP2 JP3 PD1 PD2 PS1 PS2 RA1 RA2 RF1 RF2 = pinhead
L1 L2 TX1 TX2 = led
L3 = wuerth-elektronik
OC1 OC3 = avago
Q1 Q3 R3 R4 R10 R11 R87 R93 = Discrete
R1 R2 R5-R9 R14-R26 RC1-RC10 RHWB RM1-RM4 RM9-RM12 RP3A RP3B RSCL1-RSCL3 RSDA2 RSENA1 RSENB1 = resistor
Z1 Z2 = varistor

## Nets
5VMOT: C15.2 C16.2 IC2.2 IC2.4 IC3.P$12 PC2.+ RM1.1 RM2.1 RM3.1 RM4.1 RM9.1 RM11.1
12PWR+ [gnd]: 12-PWR-1.P1 C2.2 IC1.3 JP2.4 JP3.4
+5V: C3.1 C4.1 C9.1 CAT.1 D2.C F2.2 IC1.2 IC1.4 ICSP.2 L3.1 PD1.2 PD2.2 PS1.3 PS2.3 R3.1 R4.2 R11.1 R12.1 R13.2 R24.2 R25.2 R87.2 RC1.2 RC2.2 RC3.2 RC4.2 RC5.2 RC6.2 RC7.2 RC8.2 RC9.2 RC10.2 RF1.3 RF2.3 RSCL2.1 RSDA2.1 U1.2 U1.7 U1.14 U1.34 U4.16 U5.16
AREF [motor]: C6.1 U1.42
AVCC: C7.1 L3.2 U1.24 U1.44
D1/TX: U1.21
D+: JP1.D+ RP3A.2 Z1.1
D-: JP1.D- RP3B.2 Z2.1
GND [gnd]: 12-PWR-1.P2 C2.1 C3.2 C4.2 C5.2 C6.2 C7.2 C9.2 C12.1 C13.1 C14.- CAT.2 IC1.1 ICSP.6 JP1.GND JP2.3 JP3.3 OC3.9 OC3.11 PS1.2 PS2.2 Q1.2 Q3.2 R1.1 R2.1 R13.1 RF1.2 RF2.2 RHWB.2 TX1.C TX2.C U1.5 U1.15 U1.23 U1.35 U1.43 U1.P$1 U4.8 U4.13 U5.8 U5.13 Y3.2 Y3.4 Z1.2 Z2.2
GNDMOT [gnd]: C1.1 C15.1 C16.1 D9.P$2 D10.P$2 D11.P$2 D12.P$2 IC2.1 IC3.P$1 IC3.P$10 IC3.P$11 IC3.P$20 IC3.P$21 IC3.P$22 IC3.P$23 JP2.1 JP3.1 MOT-PWR-1.P2 OC1.9 OC1.11 OC1.13 OC1.15 PC2.- RM10.2 RM12.2 RSENA1.2 RSENB1.2
HWB: RHWB.1 U1.33
IN11: IC3.P$7 OC1.16 RM1.2
IN11#: OC1.2 U1.36
IN12: IC3.P$9 OC1.14 RM2.2
IN12#: OC1.4 U1.37
IN21: IC3.P$13 OC1.12 RM3.2
IN21#: OC1.6 U1.38
IN22: IC3.P$15 OC1.10 RM4.2
IN22#: OC1.8 U1.39
IO12*_NC: U1.26
IO13*_NC: U1.32
LC1: L1.K PS1.1 Q3.3 R87.1
LC1#: OC3.12 R93.1
LC1_UC: OC3.6 U1.1
LC2: L2.K PS2.1 Q1.3 R4.1
LC2#: OC3.10 R10.1
LC2_UC: OC3.8 U1.25
M1-A [motor]: D9.P$1 D14.P$2 IC3.P$4 M1.P1
M1-B [motor]: D10.P$1 D15.P$2 IC3.P$5 M1.P2
M2-A [motor]: D11.P$1 D16.P$2 IC3.P$16 M2.P1
M2-B [motor]: D12.P$1 D13.P$2 IC3.P$17 M2.P2
MISO: ICSP.1 JP2.10 JP3.10 U1.11
MOSI: ICSP.4 JP2.9 JP3.9 U1.10
N$1: OC1.3 RC2.1
N$2: OC1.5 RC3.1
N$3: OC3.5 RC5.1
N$4: OC1.7 RC4.1
N$5: RC8.1 U5.10
N$6: OC3.7 RC6.1
N$7: Q1.1 R10.2 R11.2
N$8: RC7.1 U4.10
N$9: OC3.1 RC9.1
N$10: OC3.3 RC10.1
N$11: RSCL1.1 U1.22
N$12: R5.2 U5.15
N$13: L1.A R24.1
N$14: R6.2 U5.1
N$15: R7.2 U5.2
N$16: R8.2 U5.3
N$17: R16.2 U5.7
N$18: RSCL1.2 TX1.A
N$19: RSCL3.2 TX2.A
N$20: R15.2 U5.6
N$21: R9.2 U5.4
N$22: R17.2 U4.15
N$23: R18.2 U4.1
N$24: R19.2 U4.2
N$25: R20.2 U4.3
N$26: R26.2 U4.7
N$27: R23.2 U4.6
N$28: R21.2 U4.4
N$29: R14.2 U5.5
N$51: L2.A R25.1
N$56: OC3.16 RM9.2
N$57: OC3.14 RM11.2
N$117: OC1.1 RC1.1
N$317: Q3.1 R3.2 R93.2
PS1: PD1.1 PS1.4 R1.2 U1.40
PS2: PD2.1 PS2.4 R2.2 U1.41
PWM1: IC3.P$8 OC3.15 RM10.1
PWM1#: OC3.2 U1.31
PWM2: IC3.P$14 OC3.13 RM12.1
PWM2#: OC3.4 U1.27
RD+: RP3A.1 U1.4
RD-: RP3B.1 U1.3
RESET: D2.A ICSP.5 R5.1 R6.1 R7.1 R8.1 R9.1 R12.2 R14.1 R15.1 R16.1 U1.13
RESET1: R22.2 U4.5
RFID-EN1: RF1.1 U1.12
RFID-EN2: RF2.1 U1.30
RFID-TX: U1.20
RFID-TX1: RF1.4 U1.29
RFID-TX2: RF2.4 U1.28
SCK: ICSP.3 JP2.8 JP3.8 U1.9
SCL: RSCL2.2 U1.18
SDA: RSDA2.2 U1.19
SERIAL_OUT1: U4.9 U5.14
SERIAL_OUT2_NC: U5.9
SNSA: IC3.P$2 RSENA1.1
SNSB: IC3.P$19 RSENB1.1
SPI-SS: R17.1 R18.1 R19.1 R20.1 R21.1 R22.1 R23.1 R26.1 RSCL3.1 U1.8
SR_CLOCK: JP2.7 JP3.7 U4.11 U5.11
SR_LATCH: JP2.6 JP3.6 U4.12 U5.12
SR_SERIAL_IN1: JP2.5 JP3.5 U4.14
UCAP: C5.1 U1.6
VMOT [0.6096]: C1.2 D13.P$1 D14.P$1 D15.P$1 D16.P$1 IC2.3 IC3.P$6 JP2.2 JP3.2 MOT-PWR-1.P1
VUSBD: C14.+ F2.1 JP1.VBUS
XTAL1: C13.2 U1.17 Y3.3
XTAL2: C12.2 U1.16 Y3.1